# EAGLE board reflow_oven (EAGLE 6.1)
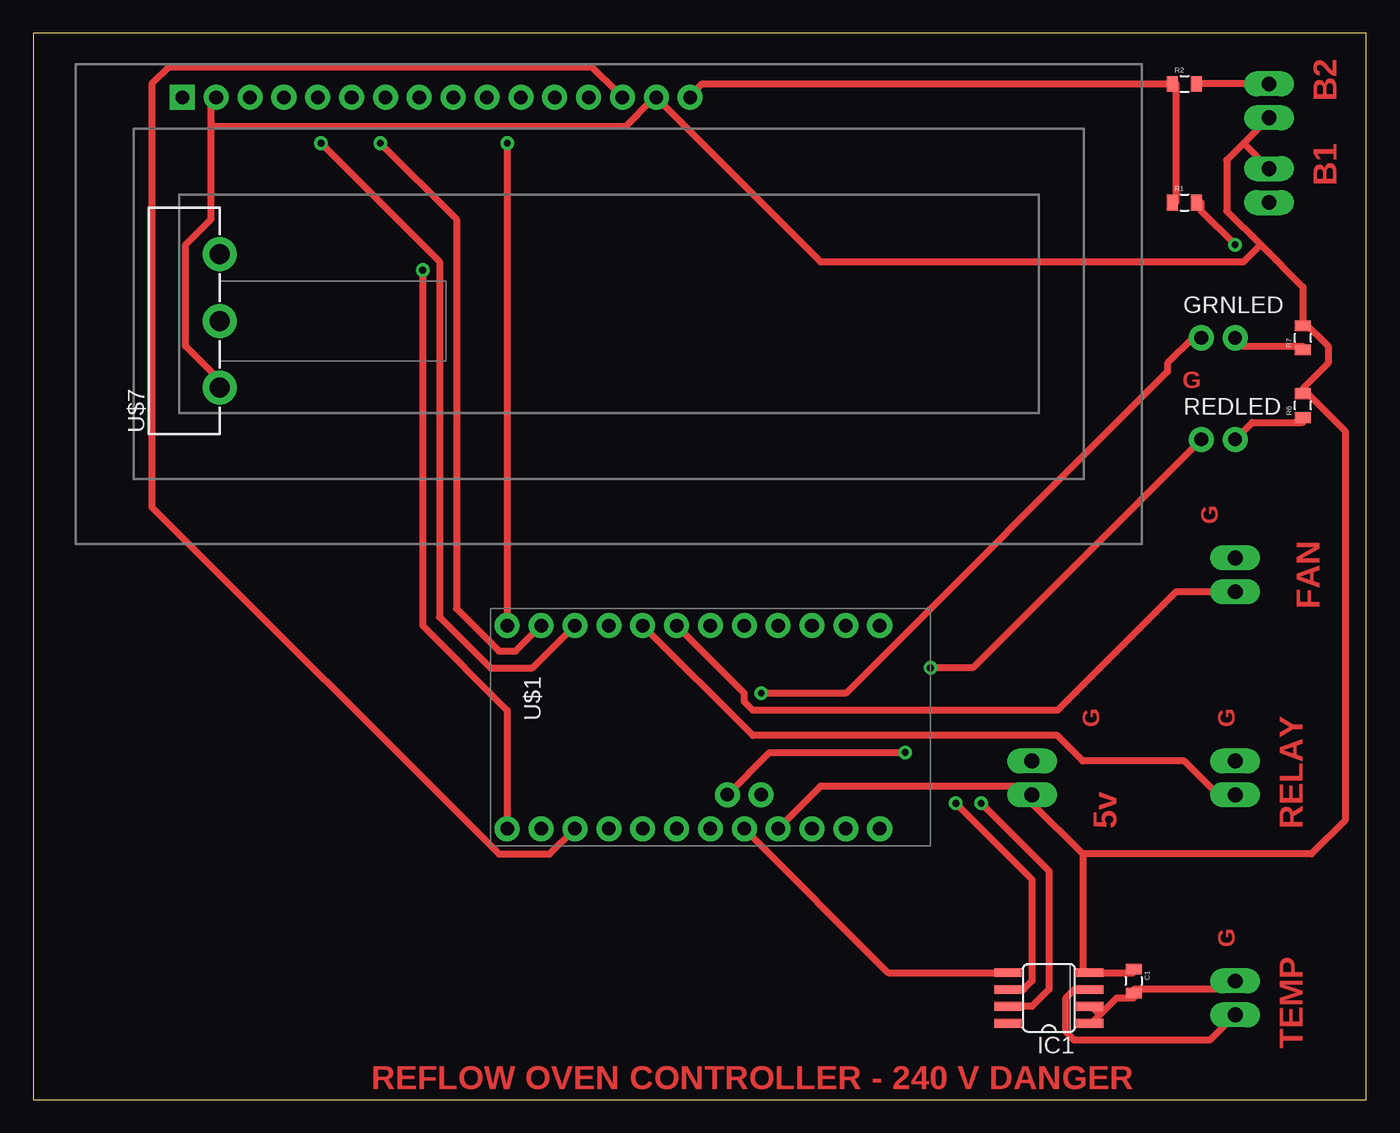
[diagram p0: board, top side]
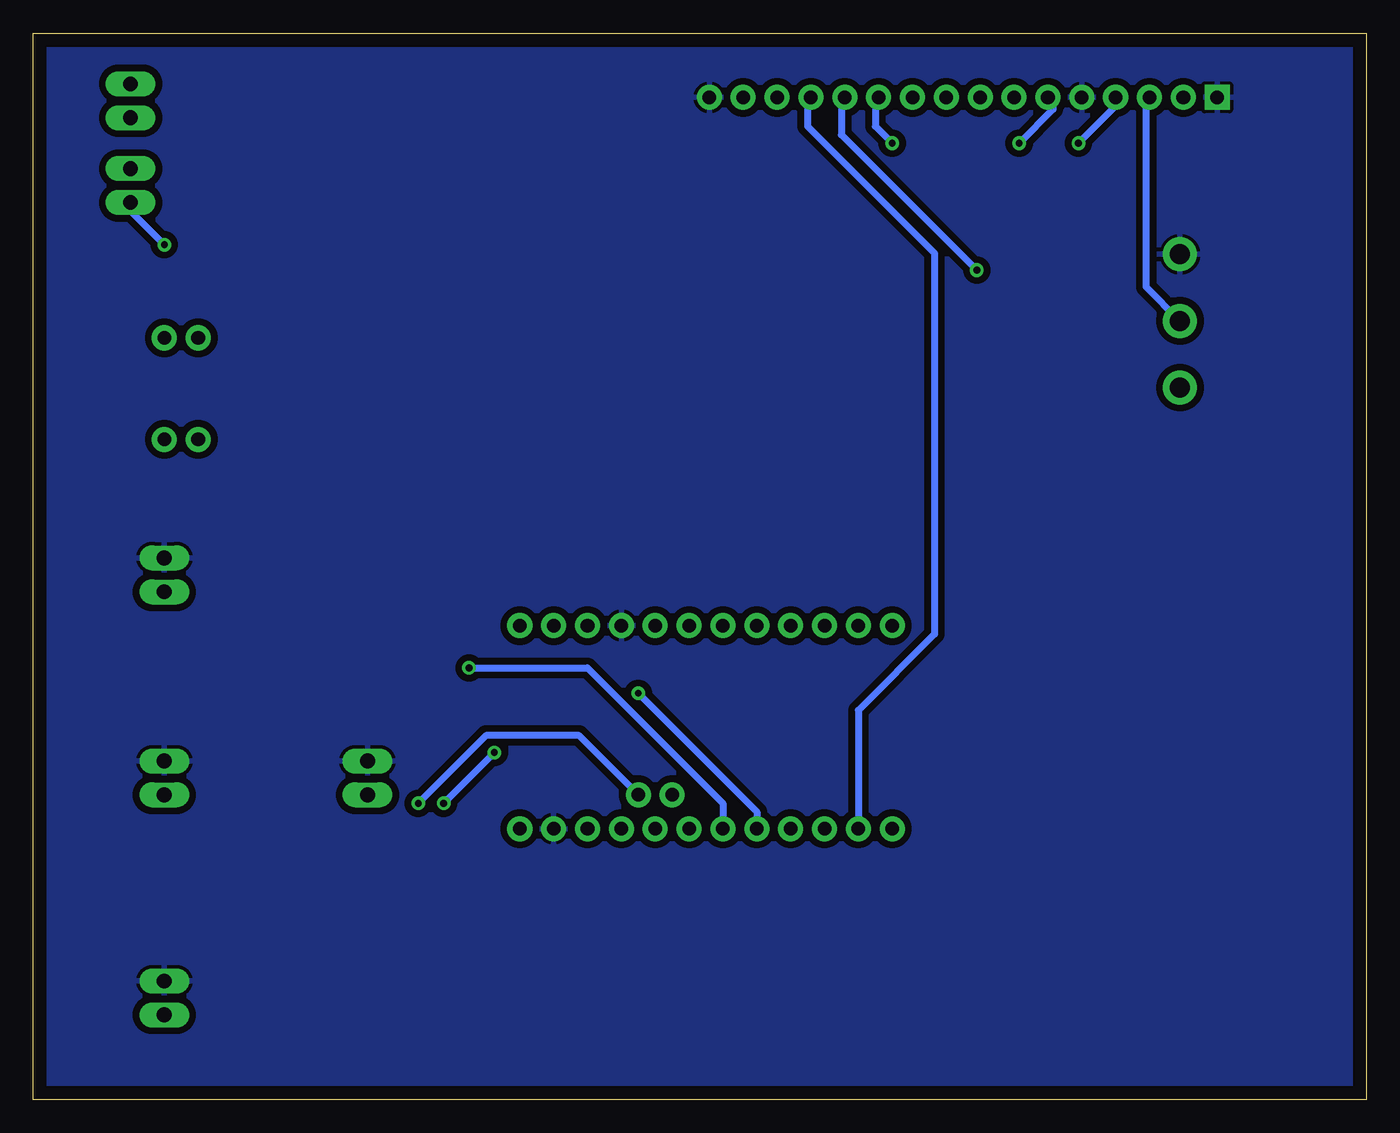
[diagram p1: board, bottom side, seen from below]

Size 100 x 80 mm. Coordinates in mm from the lower left corner, seen from the top.
Outline: 0,0 100,0 100,80 0,80 0,0
Copper layers (1*16): Top 0.035mm / dielectric 1.5mm / Bottom 0.035mm
Design rules: minimum track width 20mil, minimum drill 20mil, track to track 20mil, track to pad 20mil, pad to pad 20mil, via to via 20mil, smd to smd 10mil, copper to edge 40mil, drill to drill 10mil, minimum pad ring 15mil, minimum via ring 10mil, stop-mask expansion 0mil, vias tented up to drill 0mil, thermal gap 10mil
vRestrict: area 68.6,2.5 to 85.1,12.7; area 33,17.8 to 68.6,25.4; area 33,33 to 68.6,38.1

## Footprints (pad centres in the part's own frame; a part is rotated, then mirrored left to right if it is on the bottom)
0805 = smd 0.8 x 1.2: 1 -0.9,0; 2 0.9,0
1X02_LONGPADS = drill 1.118 pad 1.88 long: 1 0,0; 2 2.54,0
1X02_NO_SILK = drill 1.016 pad 1.88: 1 0,0; 2 2.54,0
SO08 = smd 0.66 x 2.032: 1 -1.905,-3.073; 2 -0.635,-3.073; 3 0.635,-3.073; 4 1.905,-3.073; 5 1.905,3.073; 6 0.635,3.073; 7 -0.635,3.073; 8 -1.905,3.073
LCD-16X2_NOHOLES = drill 1.016 pad 1.88 square: 1 -32,15.5 | drill 1.016 pad 1.88: 2 -29.46,15.5; 3 -26.92,15.5; 4 -24.38,15.5; 5 -21.84,15.5; 6 -19.3,15.5; 7 -16.76,15.5; 8 -14.22,15.5; 9 -11.68,15.5; 10 -9.14,15.5; 11 -6.6,15.5; 12 -4.06,15.5; 13 -1.52,15.5; 14 1.02,15.5; 15 3.56,15.5; 16 6.1,15.5
ARDUINO_MINI = drill 1.016 pad 1.88: 1 -7.62,12.7; 2 -7.62,10.16; 3 -7.62,7.62; 4 -7.62,5.08; 5 -7.62,2.54; 6 -7.62,0; 7 -7.62,-2.54; 8 -7.62,-5.08; 9 -7.62,-7.62; 10 -7.62,-10.16; 11 -7.62,-12.7; 12 -7.62,-15.24; 13 7.62,-15.24; 14 7.62,-12.7; 15 7.62,-10.16; 16 7.62,-7.62; 17 7.62,-5.08; 18 7.62,-2.54; 19 7.62,0; 20 7.62,2.54; 21 7.62,5.08; 22 7.62,7.62; 23 7.62,10.16; 24 7.62,12.7; 26 5.08,3.81; 27 5.08,1.27
POT_ALPHA_RV16AF-20 = drill 1.5 pad 2.54: 1 -5,0; 2 0,0; 3 5,0

## Placement (x,y rotation side)
C1  100nF  [0805]  82.55,8.89 270 top
FAN  [1X02_LONGPADS]  90.17,38.1 90 top
GRNLED  [1X02_NO_SILK]  87.63,57.15 0 top
IC1  MAX6675  [SO08]  76.2,7.62 90 top
POWER  [1X02_LONGPADS]  74.93,22.86 90 top
R1  2.2K  [0805]  86.36,67.31 0 top
R2  2.2K  [0805]  86.36,76.2 0 top
R6  470R  [0805]  95.25,52.07 90 top
R7  470R  [0805]  95.25,57.15 90 top
REDLED  [1X02_NO_SILK]  87.63,49.53 0 top
RELAY  [1X02_LONGPADS]  90.17,22.86 90 top
SWITCH1  [1X02_LONGPADS]  92.71,73.66 90 top
SWITCH2  [1X02_LONGPADS]  92.71,69.85 270 top
THERMO  [1X02_LONGPADS]  90.17,6.35 90 top
U1  LCD-16X2NOHOLES  [LCD-16X2_NOHOLES]  43.18,59.69 0 top
U$1  ARDUINO_MINI  [ARDUINO_MINI]  50.8,27.94 270 top
U$7  [POT_ALPHA_RV16AF-20]  13.97,58.42 90 top

## Library data of the parts
C1 FAN GRNLED POWER R1 R2 R6 R7 REDLED RELAY SWITCH1 SWITCH2 THERMO U1 U$1 U$7 = SparkFun
IC1 = adafruit

## Nets
5V: C1.1 IC1.4 POWER.1 R6.2 R7.2 SWITCH1.1 SWITCH2.1 U1.2 U1.15 U$1.21 U$7.1
A0: GRNLED.1 U$1.17
A1: REDLED.1 U$1.18
A3: IC1.5 U$1.20
A4: IC1.6 U$1.27
A5: IC1.7 U$1.26
D2: U$1.5
D3: U$1.6
D4: FAN.1 U$1.7
D5: RELAY.1 U$1.8
D7: U1.4 U$1.10
D8: U1.6 U$1.11
D9: U1.11 U$1.12
D10: U1.12 U$1.13
D11: U1.13 U$1.14
D12: U1.14 U$1.15
GND: C1.2 FAN.2 IC1.1 IC1.2 POWER.2 R1.1 R2.1 RELAY.2 THERMO.2 U1.1 U1.5 U1.16 U$1.4 U$1.23 U$7.3
N$1: U1.3 U$7.2
N$2: R1.2 SWITCH2.2
N$3: IC1.3 THERMO.1
N$4: R6.1 REDLED.2
N$5: GRNLED.2 R7.1
N$6: R2.2 SWITCH1.2

## Tracks (layer width: path | path; a pad name or v marks a point on that pad's centre or on a via)
5V
  Top 0.508: C1.1 82.55,9.53 IC1.4 78.74,9.53 78.74,18.41 | 78.74,18.41 74.93,22.23 POWER.1 74.3,23.5 59.05,23.5 U$1.21 | 95.25,53.34 97.16,55.24 97.16,56.52 95.25,58.42 | 95.25,58.42 95.25,60.96 92.08,64.14 | 92.08,64.14 89.53,66.67 89.53,70.48 90.81,71.75 | SWITCH1.1 90.81,71.75 | 95.25,58.42 R7.2 | 90.81,71.75 SWITCH2.1 | 13.34,73.03 13.34,66.04 11.43,64.14 11.43,56.52 13.97,53.98 U$7.1 | 13.34,73.03 13.34,74.93 U1.2 | 13.34,73.03 44.45,73.03 46.35,74.93 U1.15 46.99,74.93 59.05,62.87 90.81,62.87 92.08,64.14 | 78.74,18.41 95.89,18.41 98.42,20.95 98.42,50.16 95.25,53.34 | 95.25,53.34 R6.2
A0  (via drill 0.51)
  Top 0.508: v54.61,30.48 60.96,30.48 85.09,54.61 85.09,55.24 87,57.15 GRNLED.1
  Bottom 0.508: U$1.17 45.72,21.59 v54.61,30.48
A1  (via drill 0.51)
  Top 0.508: v67.31,32.38 70.48,32.38 REDLED.1
  Bottom 0.508: U$1.18 48.26,22.23 58.42,32.38 v67.31,32.38
A3
  Top 0.508: IC1.5 64.14,9.53 U$1.20
A4  (via drill 0.51)
  Top 0.508: IC1.6 74.3,8.26 74.93,8.89 74.93,16.51 v69.22,22.23 | v65.41,26.04 55.24,26.04 U$1.27
  Bottom 0.508: v65.41,26.04 v69.22,22.23
A5  (via drill 0.51)
  Top 0.508: IC1.7 74.93,6.99 76.2,8.26 76.2,17.14 v71.12,22.23
  Bottom 0.508: v71.12,22.23 66.04,27.3 59.05,27.3 U$1.26
D4
  Top 0.508: U$1.7 53.34,30.48 53.34,29.84 53.98,29.21 76.83,29.21 85.72,38.1 FAN.1
D5
  Top 0.508: U$1.8 53.98,27.3 76.83,27.3 78.74,25.4 86.36,25.4 88.9,22.86 RELAY.1
D7  (via drill 0.51)
  Top 0.508: U$1.10 37.47,32.38 34.29,32.38 30.48,36.2 30.48,62.87 v21.59,71.75
  Bottom 0.508: v21.59,71.75 18.41,74.93 U1.4
D8  (via drill 0.51)
  Top 0.508: U$1.11 36.2,33.66 34.92,33.66 31.75,36.83 31.75,66.04 v26.04,71.75
  Bottom 0.508: v26.04,71.75 23.5,74.3 23.5,74.93 U1.6
D9  (via drill 0.51)
  Top 0.508: v35.56,71.75 U$1.12
  Bottom 0.508: v35.56,71.75 36.83,73.03 36.83,74.93 U1.11
D10  (via drill 0.51)
  Top 0.508: U$1.13 35.56,29.21 29.21,35.56 v29.21,62.23
  Bottom 0.508: v29.21,62.23 39.37,72.39 39.37,74.93 U1.12
D11
  Bottom 0.508: U$1.14 38.1,29.21 32.38,34.92 32.38,63.5 41.91,73.03 41.91,74.93 U1.13
D12
  Top 0.508: U$1.15 38.73,18.41 34.92,18.41 8.89,44.45 8.89,76.2 10.16,77.47 41.91,77.47 43.81,75.56 U1.14
GND
  Top 0.508: R1.1 85.72,67.31 85.72,76.2 R2.1 50.16,76.2 49.53,75.56 U1.16 | 80.01,6.35 79.38,5.71 IC1.1 | 80.01,6.35 81.28,7.62 82.55,7.62 C1.2 82.55,8.26 89.53,8.26 THERMO.2 | 80.01,6.35 79.38,6.99 IC1.2
  pour Bottom: 0,80.01 100.33,80.01 100.33,0 0,0
N$1
  Bottom 0.508: U$7.2 16.51,60.96 16.51,74.93 U1.3
N$2  (via drill 0.51)
  Top 0.508: v90.17,64.14 87.63,66.67 87.63,67.31 R1.2
  Bottom 0.508: v90.17,64.14 92.71,66.67 SWITCH2.2
N$3
  Top 0.508: IC1.3 78.11,8.26 77.47,7.62 77.47,5.08 78.11,4.45 88.27,4.45 THERMO.1
N$4
  Top 0.508: REDLED.2 91.44,50.8 95.25,50.8 R6.1
N$5
  Top 0.508: GRNLED.2 90.81,56.52 95.25,56.52 R7.1
N$6
  Top 0.508: SWITCH1.2 R2.2

## Text on the board
Top: B2 | B1 | G | G | FAN | G | G | 5v | RELAY | G | TEMP | REFLOW OVEN CONTROLLER - 240 V DANGER